# Altium PCB PCB1.PcbDoc
Units mm, origin at the board's own origin, x right, y up, seen from the top; angles counter-clockwise.
Board outline 20.83 x 22.99 mm, 2 copper layers (Top Layer, Bottom Layer); 10 components, 7 nets, 28 pads, 0 vias.
Unrouted connection lines stored in the file: 1.
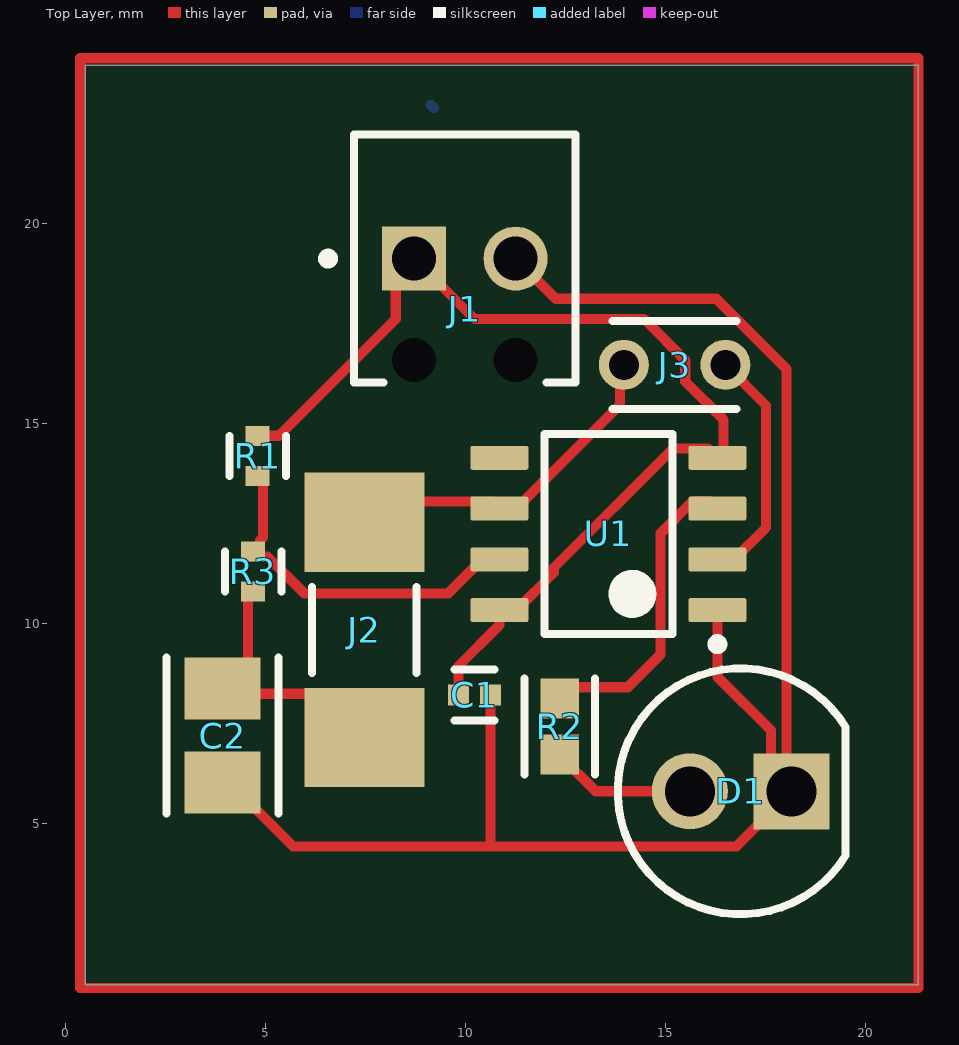
[diagram p0: Top Layer view]
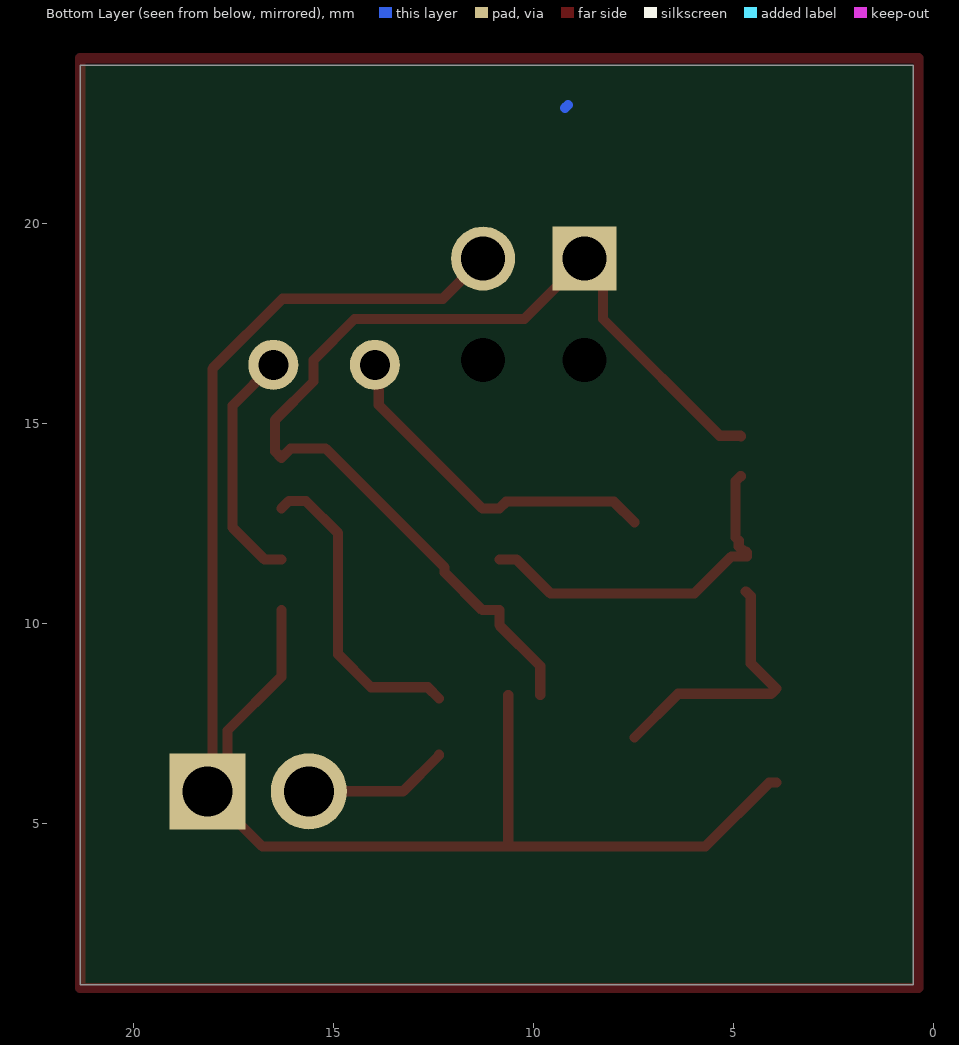
[diagram p1: Bottom Layer view, seen from below]
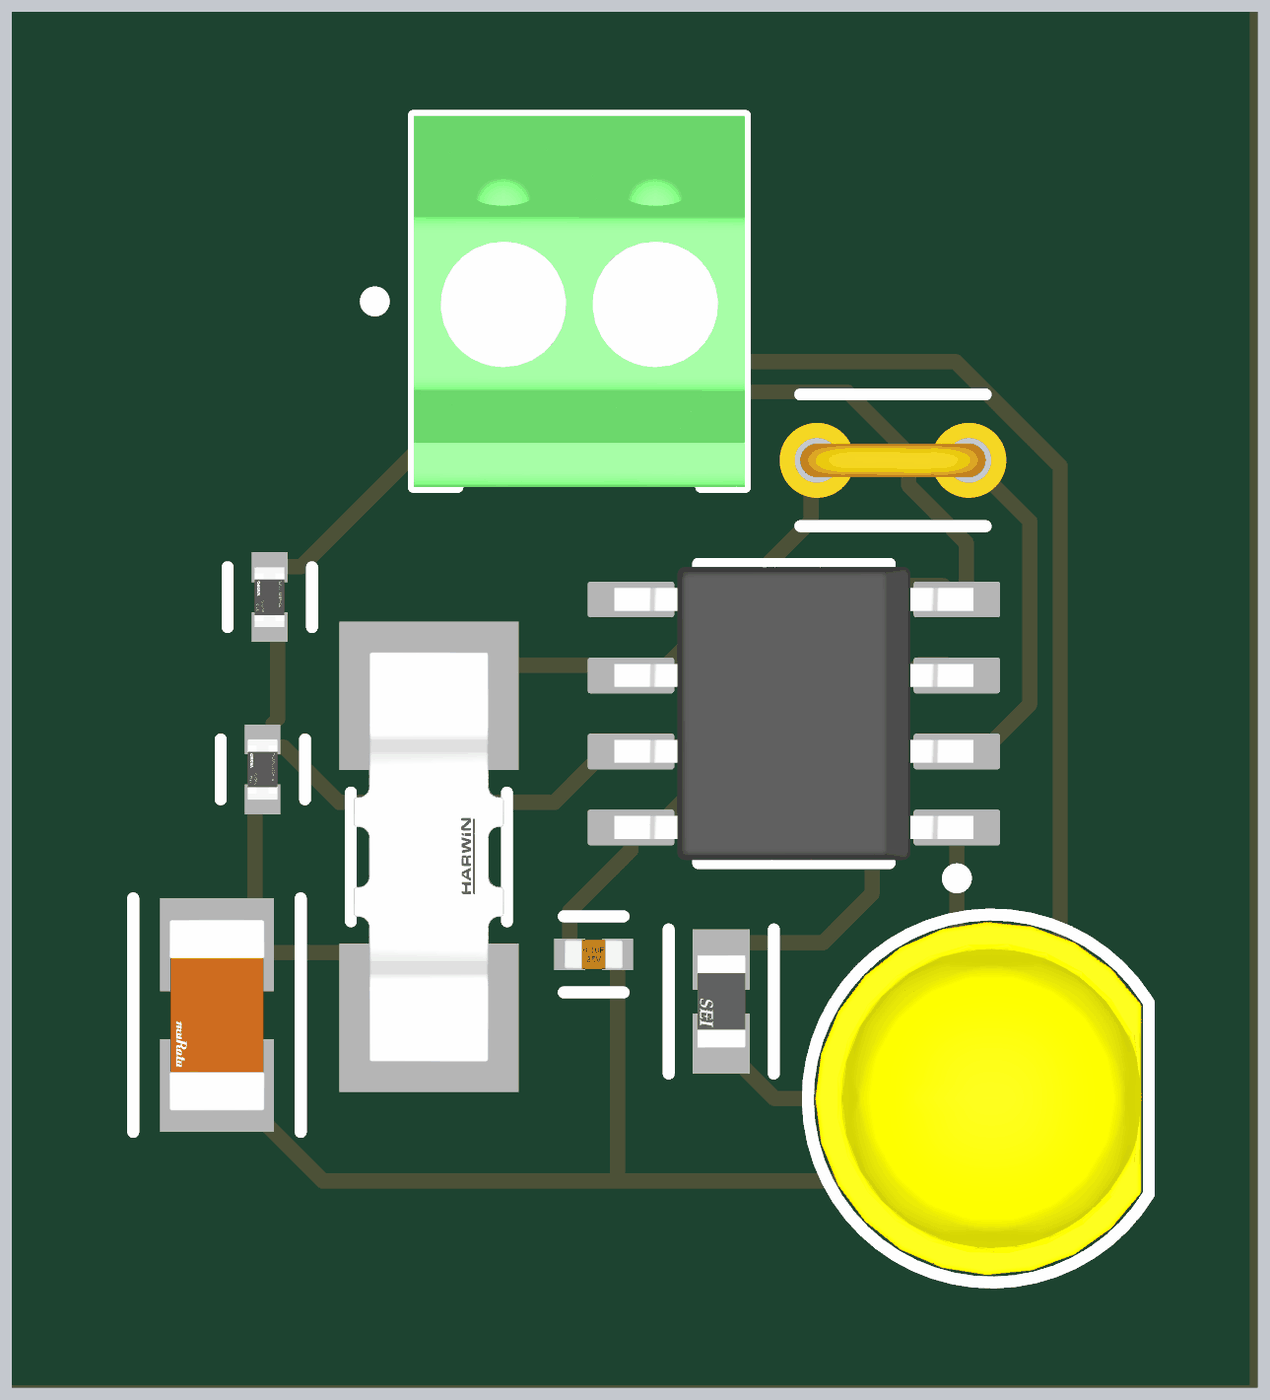
[diagram p2: 3D render of the assembled board from above, using the file's embedded part models]

## Layer stack, top to bottom
Top Solder: solder mask 0.0102, Solder Resist, Dk 3.5
Top Layer: signal copper 0.0356
Dielectric 1: dielectric 0.32, FR-4, Dk 4.8
Bottom Layer: signal copper 0.0356
Bottom Solder: solder mask 0.0102, Solder Resist, Dk 3.5

## Board outline
0.508,0.973 0.508,23.96 21.336,23.96 21.336,0.973

## Design rules (kind name [scope] priority, off if disabled: settings)
Clearance [All] p1: gap=0.254 ignorepadtopadclearanceinfootprint=FALSE
PolygonConnect [All] p1: connectstyle=Relief reliefconductorwidth=0.254 reliefentries=4 polygonreliefangle="90 Angle" airgapwidth=0.254
RoutingVias [All] p1: holewidth=0.711 width=1.27 viastyle="Through Hole" minholewidth=0.711 minwidth=1.27 maxholewidth=0.711 maxwidth=1.27
SolderMaskExpansion [All] p1: expansion=0 istentingtop=FALSE
SupplyNets "Schematic Supply Nets_1" [InNet('GND')] p1: voltage=0.000
SupplyNets "Schematic Supply Nets" [InNet('VCC')] p2: voltage=0.000
Width [All] p1: maxlimit=0.254 minlimit=0.254 preferedwidth=0.254
30 further rules are at their usual default settings.

## Classes and differential pairs
component class LEDblinker_sche: D1

## Components (designator, comment, footprint, x,y, rotation, side; value= is the part's Value field where it differs from the comment)
C1 "C0402C103M8RACTU" FP-C0402-BB-MFG 10.235,8.212 r0 top value="10,000 pF"
C2 "GCJ31CD7YA106KE02L" FP-GCJ31C-0_4-IPC_C 3.937,7.196 r270 top
D1 "SSL-LX5093YD" FP-SSL-LX5093YD-MFG 16.891,5.803 r180 top
J1 "1725656" PHOE-1725656-2 9.996,19.122 r0 top
J2 "S1911-46R" FP-S1911-46R-MFG 7.481,9.84 r90 top
J3 "999-11-110-10-000000" FP-999-11-110-10-000000-MFG 15.24,16.467 r0 top
R1 "RT0402DRE0747KL" FP-RT0402-MFG 4.816,14.181 r90 top value=47KΩ
R2 "RMCF0603JG470R" FP-RMCF0603-IPC_B 12.368,7.424 r270 top
R3 "RT0402DRE0747KL" FP-RT0402-MFG 4.699,11.303 r90 top value=47KΩ
U1 "NE555DR" D0008A_N 13.584,12.238 r180 top

## Footprints (in the part's own frame and the unit in brackets; to place one, negate y for a bottom-side part, rotate by r counter-clockwise, add the part's x,y. Pads: shape width x height; smd on the part's side, far side on the other; paste and mask are expansions set on the pad)
D0008A_N [mm] "SOIC, 8-Leads, Body 5x4mm, Pitch 1.27mm, IPC Medium Density"
  rrect17% 1.45x0.6 smd: 1(-2.725,1.905) 2(-2.725,0.635) 3(-2.725,-0.635) 4(-2.725,-1.905) 5(2.725,-1.905) 6(2.725,-0.635) 7(2.725,0.635) 8(2.725,1.905)
  silkscreen extent -2.85,-2.5 1.6,2.88, body extent -3,-2.45 3,2.45, height 1.63
FP-999-11-110-10-000000-MFG [mm]
  round 1.25 hole 0.75 paste-2539.97 mask+0: 1(-1.27,0) 1(1.27,0)
  silkscreen extent -1.55,-1.1 1.55,1.1, body extent -1.99,-0.72 1.99,0.72, height 0.25
FP-C0402-BB-MFG [mm]
  rect 0.52x0.52 smd paste+0 mask+0: 1(-0.4,0) 2(0.4,0)
  silkscreen extent -0.5,-0.64 0.5,0.64, body extent -0.8,-0.4 0.8,0.4, height 0.25
FP-GCJ31C-0_4-IPC_C [mm]
  rect 1.553x1.903 smd paste+0 mask+0: 1(-1.175,0) 2(1.175,0)
  silkscreen extent -1.95,-1.4 1.95,1.4, body extent -2.05,-1.1 2.05,1.1, height 0.25
FP-RMCF0603-IPC_B [mm]
  rect 1.006x0.958 smd paste+0 mask+0: 1(-0.701,0) 2(0.701,0)
  silkscreen extent -1.2,-0.88 1.2,0.88, body extent -1.45,-0.73 1.45,0.73, height 0.25
FP-RT0402-MFG [mm]
  rect 0.5x0.6 smd paste+0 mask+0: 1(-0.5,0) 2(0.5,0)
  silkscreen extent -0.5,-0.71 0.5,0.7, body extent -0.85,-0.4 0.85,0.4, height 0.25
FP-S1911-46R-MFG [mm]
  rect 2.48x3 smd paste+0 mask+0: 1(-2.69,0) 2(2.69,0)
  silkscreen extent -1.07,-1.31 1.07,1.31, body extent -4.03,-1.6 4.03,1.6, height 0.25
FP-SSL-LX5093YD-MFG [mm]
  rect 1.9x1.9 hole 1.25 paste-2539.97 mask+0: 1(-1.27,0)
  round 1.9 hole 1.25 paste-2539.97 mask+0: 2(1.27,0)
  silkscreen extent -2.63,-3.07 3.07,3.07, body extent -3.17,-3.17 3.18,3.18, height 0.25
PHOE-1725656-2 [mm] "Connector, 2-Leads, Body 6.2x5.4mm, Pitch 2.54mm"
  rect 1.6x1.6 hole 1.1: 1(-1.27,0)
  round 1.6 hole 1.1: 2(1.27,0)
  round 0 hole 1.1 unplated: MH1(-1.27,-2.54) MH2(1.27,-2.54)
  silkscreen extent -3.54,-3.1 2.77,3.1, body extent -2.77,-3.1 2.77,3.1, height 9

## Part data
C1: library part CMP-2008-03079-2, "CAP CER 10000PF 10V X7R 0402", Capacitance="10,000 pF", Manufacturer=Kemet, Package=C0402-BB, Temperature="-55°C to +125°C", Temperature Characteristic=X7R, Temperature Coefficient=15%, Temperature Range High=+125°C, Temperature Range Low=-55°C, Tolerance=0.2, Voltage Rating="10 V", Automotive=No, Category=Cap, ComponentLink2Description=Datasheet, ComponentLink2URL=https://content.kemet.com/datasheets/KEM_C1002_X7R_SMD.pdf, Device Class L1="Passive Components", Device Class L2=Capacitors, Device Class L3="Ceramic Capacitors", Digikey Description="CAP CER 10000PF 10V X7R 0402", Height=0.55mm, Ipc Land Pattern Name=CAPC10050X50, Lead Free=Yes, Manufacturer Part Number=C0402C103M8RACTU, Material=Ceramic, Mouser Description="Multilayer Ceramic Capacitors MLCC - SMD/SMT 10volts 10000pF X7R 20%", Octopart=https://octopart.com/c0402c103m8ractu-kemet-12595671, RoHS=TRUE
C2: library part CMP-06035-004889-1, "Cap Ceramic 10uF 35V X7T 10% SMD 1206 +125°C Embossed Plastic T/R"
D1: library part CMP-57192-000007-1, "LED YELLOW DIFFUSED T-1 3/4 T/H", Case/Package=Radial, Color=Yellow, Forward Current=20mA, Forward Voltage=2.1V, Max Operating Temperature=85°C, Min Operating Temperature=-40°C, Package Quantity=1000, Diameter=5mm, Dominant Wavelength=568nm, Height=8.6mm, Illumination Color=Yellow, Lead Free="Lead Free", Length=0.5inch, Lens Color=Yellow, Lens Style=Dome, Lens Transparency=Diffused, Luminous Intensity=30mcd, Mount="Through Hole", Number of LEDs=1, Number of Pins=2, Packaging=Bulk, REACH SVHC="No SVHC", RoHS Compliant=Yes, Series=-, Test Current=20mA, Viewing Angle=60°, Wavelength=585nm, Weight=0.01lb, Width=1.5inch
J1: library part CMP-2000-05299-1, "Male Header, Pitch 2.54 mm, 1 x 2 Position, Height 9 mm, Tail Length 3.5 mm", Colour=Green, Manufacturer="Phoenix Contact", Content=250pc(s), Datasheet URL=http://datasheet.octopart.com/1725656-Phoenix-Contact-datasheet-5302866.pdf, Datasheet Version=Apr-08, Industrial packaging=Yes, Manufacturer part No.=1725656, Manufacturer URL=http://www.phoenixcontact.com/, Number of Contacts=2, Pitch=2.54mm, Type=MPT0,5/2-2,54
J2: library part CMP-15817-000009-1, "JUMPER TIN SMD", Color=Silver, Current Rating=10A, Package Quantity=4000, Contact Material=Brass, Contact Plating=Tin, Depth=2.51mm, Gender=Non-Gendered, Height=0.038inch, Length=6.85mm, Material=Brass, Number of Contacts=2, Number of Positions=2, Number of Rows=1, Orientation=Straight, Packaging="Tape and Reel", Pitch=0.119inch, Plating=Tin, REACH SVHC="No SVHC", RoHS Compliant=Yes, Series=S1, Termination=SMD/SMT
J3: library part CMP-07777-000007-1, "JUMPER NON-INSULATED MALE .100\"", Max Voltage Rating (AC)=100V, Max Voltage Rating (DC)=150V, Package Quantity=1, Contact Plating=Gold, Depth=0.55mm, Height=0.217inch, Housing Material=Polybutylene, Lead Free="Lead Free", Length=3.09mm, Mount="Through Hole", Number of Positions=1, Number of Rows=1, Orientation=Straight, Packaging=Bulk, Pitch=2.54mm, RoHS Compliant=Yes, Series=999
R1 R3: library part CMP-03412-004316-1, "RES SMD 47K OHM 0.5% 1/16W 0402", Manufacturer=Yageo, Package=RT0402, Power Rating=0.063W, Resistance=47KΩ, Temperature="-55°C to +155°C", Temperature Coefficient="50 ppm/°C", Temperature Range High=+155°C, Temperature Range Low=-55°C, Tolerance=0.005, Voltage Rating=50V, Automotive=No, Category=Res, ComponentLink2Description=Datasheet, ComponentLink2URL=http://www.yageo.com/documents/recent/PYu-RT_1-to-0.01_RoHS_L_9.pdf, Composition="Thin Film", Device Class L1="Passive Components", Device Class L2=Resistors, Device Class L3="Chip SMD Resistors", Digikey Description="RES SMD 47K OHM 0.5% 1/16W 0402", Footprint Url=http://www.yageo.com/exep/pages/download/literatures/PYu-R_Mount_10.pdf, Height=0.35mm, Ipc Land Pattern Name=RESC10050X30, Lead Free=Yes, Manufacturer Part Number=RT0402DRE0747KL, Octopart=https://octopart.com/rt0402dre0747kl-yageo-1418105, RoHS=TRUE, Series=RT
R2: library part CMP-26527-007559-1, "470Ω ±5% 0.1W 0603 Thick Film Chip Resistor AEC-Q200 compliant", Case/Package=0603, Max Operating Temperature=155°C, Max Power Dissipation=100mW, Min Operating Temperature=-55°C, Package Quantity=10000, Resistance=470R, Resistor Type="Thick Film", Temperature Coefficient=200ppm/°C, Tolerance=5%, Contact Plating=Tin, Features="Automotive AEC-Q200", Height=0.022inch, Length=0.061inch, Mount="Surface Mount", Number of Terminations=2, Packaging="Tape and Reel", Radiation Hardening=No, RoHS Compliant=Yes, Series=RMCF, Width=0.031inch
U1: library part CMP-016-00007-3, "Precision Timer, 4.5 to 16 V, 0 to 70 degC, 8-Pin SOIC (D), Green (RoHS & no Sb/Br), Tape and Reel", Case/Package=SOIC, Frequency=100kHz, Manufacturer="Texas Instruments", Max Operating Temperature=70°C, Max Ouput Current=-200mA, Max Supply Voltage=16V, Min Operating Temperature=0°C, Min Supply Voltage=4.5V, Package Description="8-Pin Small Outline Integrated Circuit, Body 4.9 x 3.9 mm, Pitch 1.27 mm", Package Quantity=2500, Package Reference=D0008A, Package Version="4040047-3/M, 06/2011", Datasheet URL=http://www.ti.com/general/docs/lit/getliterature.tsp?genericPartNumber=NE555&fileType=pdf, Datasheet Version="SLFS022I, 09/2014", Manufacturer URL=http://www.ti.com/, Mounting Technology=SM, Package URL=http://www.ti.com/lit/ml/msoi002j/msoi002j.pdf, Packaging=TapeandReel, Pins=8, RoHS Compliant=True

## Nets (pads, with @x,y where several pads share a name; then routed paths per layer and width w, separated by ;. In a path a pad name is that pad's centre, name@x,y a point inside that pad or via, vN(x,y) a via of type N, cw(c..) or ccw(c..) an arc to the next point about the centre after c; other vN are vias at no path point)
GND: C1.2 C2.2 D1.1 J1.2 U1.1 | length 42.8
  Top Layer w0.254: C2.2 4.112,6.021 5.707,4.426 10.635,4.426 16.783,4.426 D1.1 17.923,6.042 18.034,6.153 18.034,16.366 16.282,18.118 12.27,18.118 J1.2 ; 10.635,4.451 C1.2 ; U1.1 16.309,8.667 17.653,7.323 17.653,6.311 D1.1@17.907,6.057
NetC2_1: C2.1 J2.1 R3.1 | length 6.8
  Top Layer w0.254: R3.1 4.695,10.803 4.572,10.68 4.572,9.006 C2.1 4.064,8.244 6.387,8.244 J2.1
NetD1_2: D1.2 R2.2 | length 3.6
  Top Layer w0.254: R2.2 12.368,6.699 13.264,5.803 D1.2
NetJ2_2: J2.2 J3.1 U1.2 U1.6 | length 14.8
  Top Layer w0.254: J2.2 7.997,13.046 10.686,13.046 U1.6 11.284,12.873 13.872,15.461 13.872,16.369 J3.1@13.97,16.467 ; U1.2 16.734,11.603 17.526,12.395 17.526,15.451 J3.1@16.51,16.467
NetR1_1: R1.1 R3.2 U1.7 | length 9.1
  Top Layer w0.254: R1.1 4.83,13.681 4.953,13.558 4.953,12.149 4.872,12.068 4.872,11.926 4.749,11.803 R3.2 4.666,11.77 4.666,11.674 5.058,11.674 5.98,10.752 9.583,10.752 10.434,11.603 U1.7
NetR2_1: R2.1 U1.3 | length 7.8
  Top Layer w0.254: R2.1 12.648,8.405 14.068,8.405 14.889,9.226 14.889,12.255 15.695,13.061 16.12,13.061 U1.3
VCC: C1.1 J1.1 R1.2 U1.4 U1.8 | length 26.9
  Top Layer w0.254: R1.2 4.826,14.691 5.348,14.691 8.266,17.61 8.266,18.663 J1.1 10.238,17.61 14.478,17.61 15.504,16.584 15.504,16.05 16.464,15.09 16.464,14.298 U1.4 16.077,14.374 15.203,14.374 12.226,11.398 12.226,11.275 11.284,10.333 U1.8 10.859,9.959 9.835,8.936 C1.1
pads on no net: J1.MH1 J1.MH2 U1.5
copper on no net: | length 88.5
  Top Layer w0.254: 0.381,0.889 21.336,0.889 21.336,24.13 0.381,24.13 0.381,0.889
  Bottom Layer w0.254: 9.144,22.963 9.217,22.89